# EAGLE board Servo100x80 (EAGLE 6.0)
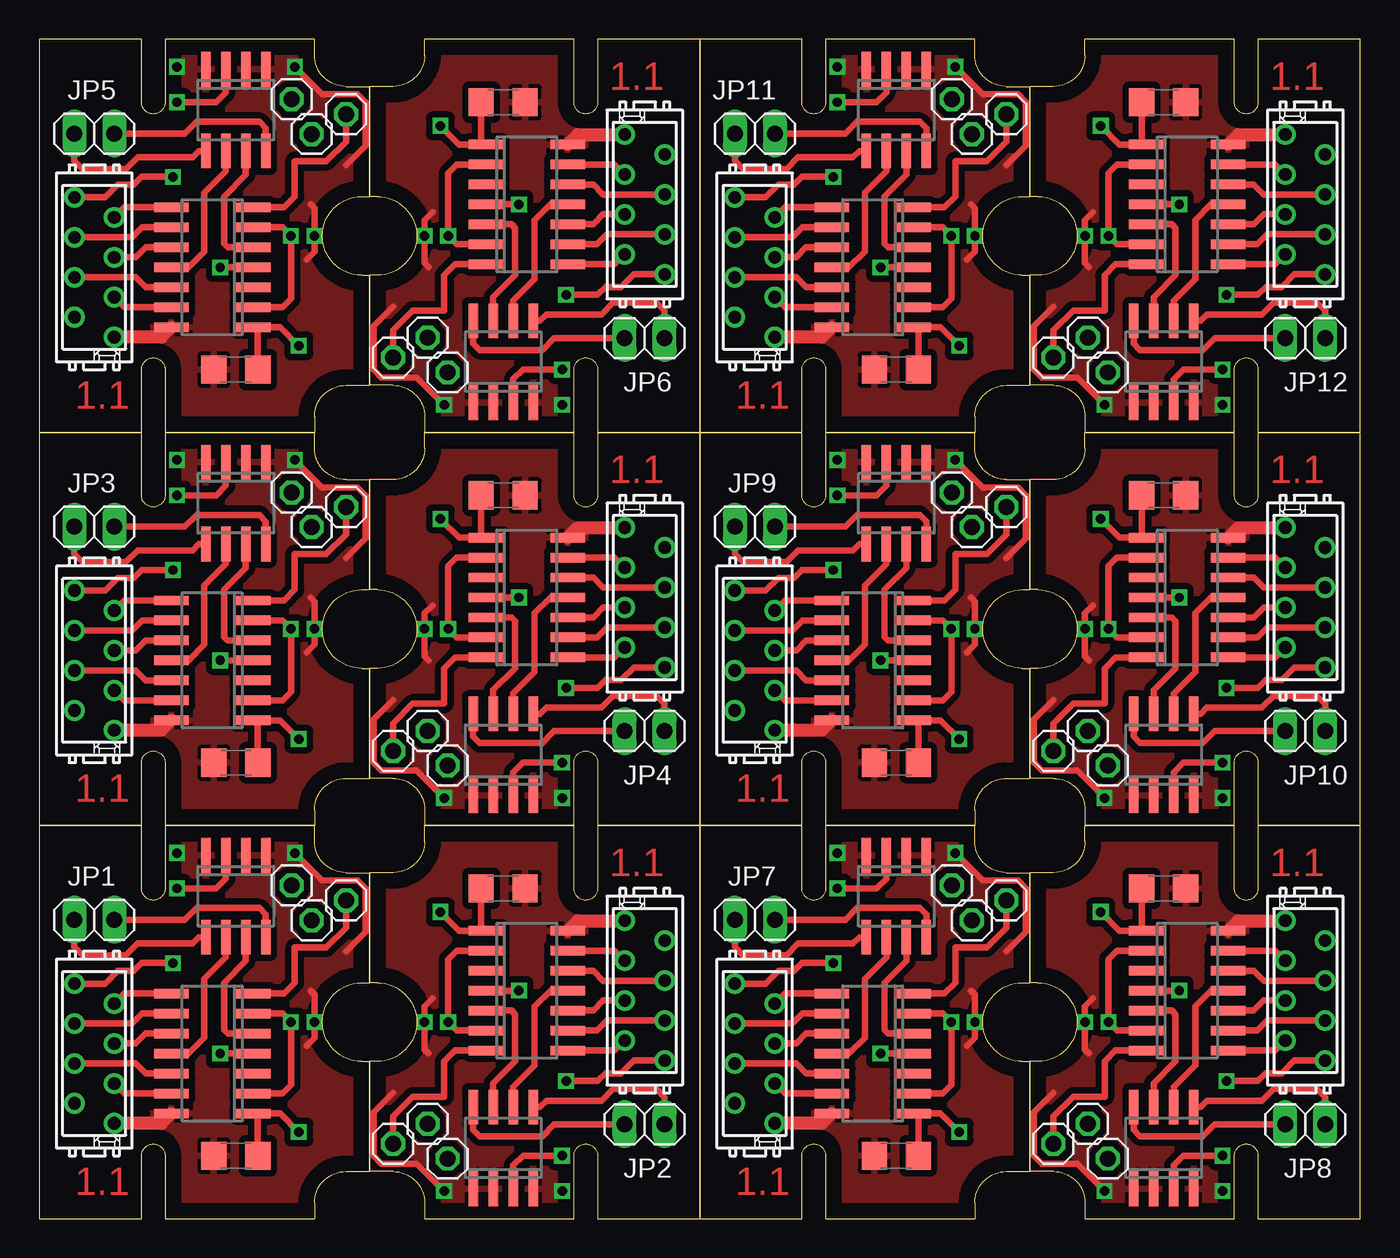
[diagram p0: board, top side]
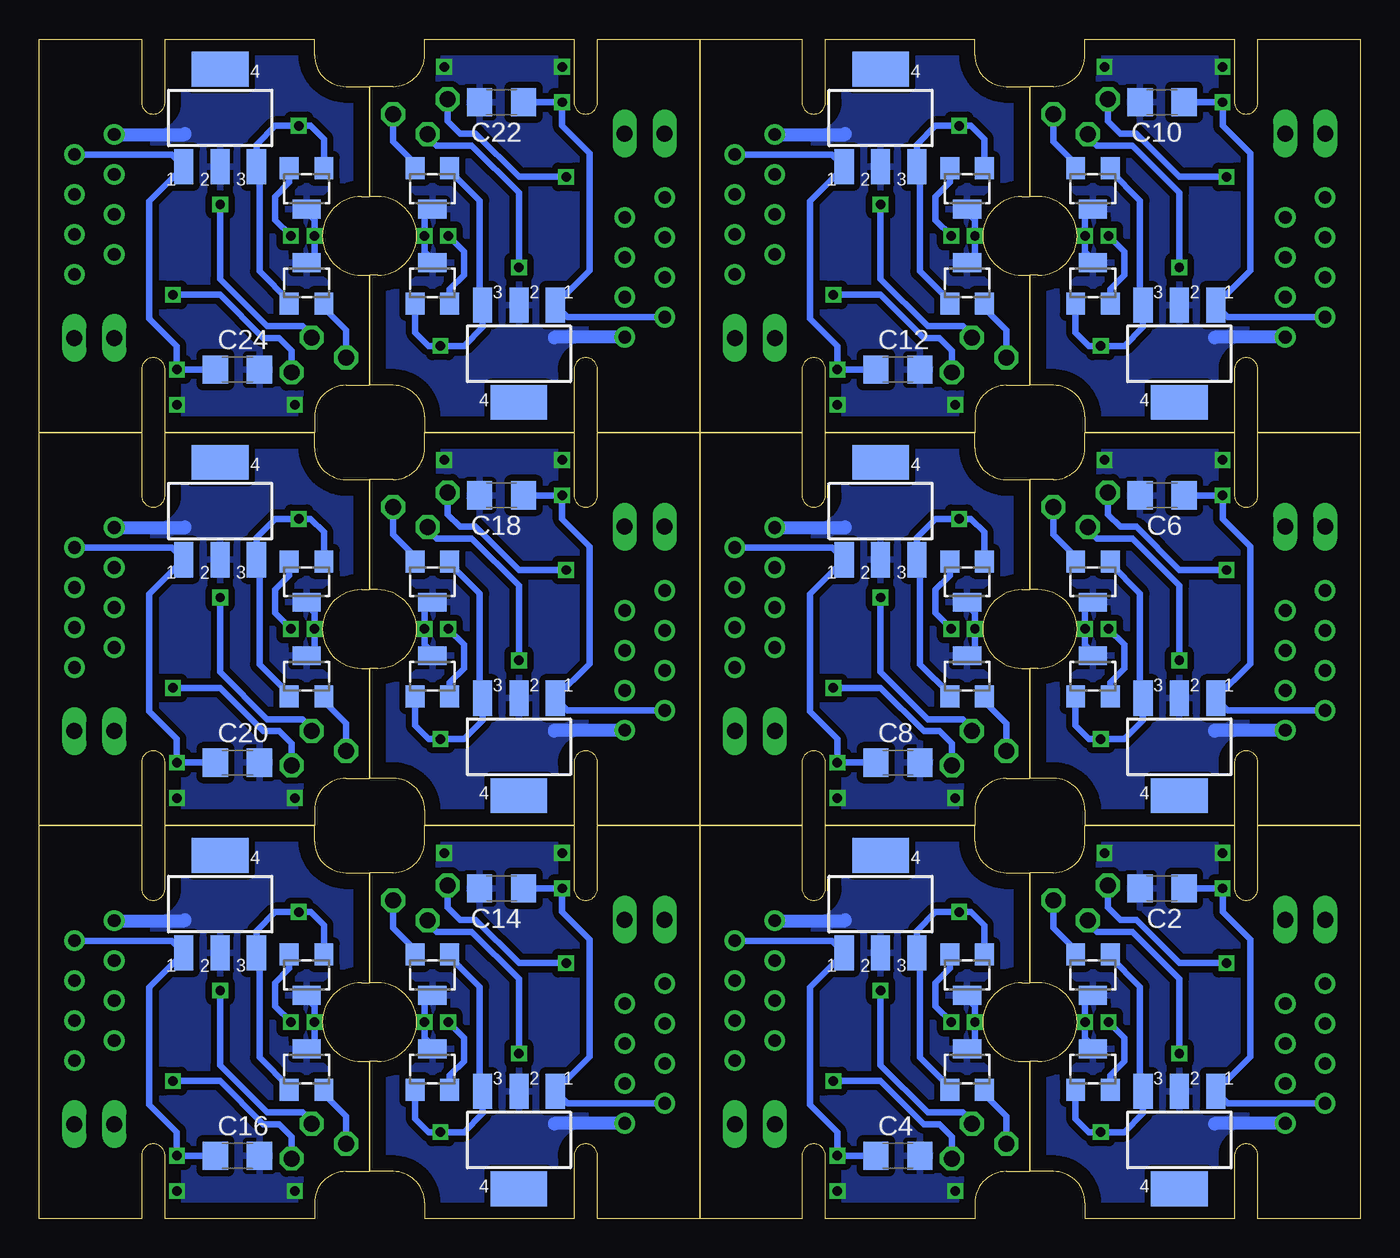
[diagram p1: board, bottom side, seen from below]

Size 84 x 75 mm. Coordinates in mm from the lower left corner, seen from the top.
Outline: 264 segments
Copper layers (1*16): Top 0.035mm / dielectric 1.5mm / Bottom 0.035mm
Design rules: minimum track width 10mil, minimum drill 24mil, track to track 8mil, track to pad 8mil, pad to pad 8mil, via to via 8mil, smd to smd 8mil, copper to edge 40mil, drill to drill 8mil, minimum pad ring 10mil, minimum via ring 8mil, stop-mask expansion 4mil, vias tented up to drill 0mil, thermal gap 10mil

## Footprints (pad centres in the part's own frame; a part is rotated, then mirrored left to right if it is on the bottom)
1X01 = drill 1.016 octagon: 1 0,0
C1206 = smd 1.6 x 1.8: 1 -1.4,0; 2 1.4,0
SOT23-W = smd 1.2 x 1.4: 1 -1.1,-1.3; 2 1.1,-1.3 | smd 1.8 x 1.2: 3 0,1.3
SOT223 = smd 1.219 x 2.235: 1 -2.311,-3.099; 2 0,-3.099; 3 2.311,-3.099 | smd 3.6 x 2.2: 4 0,3.099
1X02 = drill 1.016 long: 1 -1.27,0; 2 1.27,0
SO-14 = smd 0.6 x 2.2: 1 -3.81,-2.6; 2 -2.54,-2.6; 3 -1.27,-2.6; 4 0,-2.6; 5 1.27,-2.6; 6 2.54,-2.6; 7 3.81,-2.6; 8 3.81,2.6; 9 2.54,2.6; 10 1.27,2.6; 11 0,2.6; 12 -1.27,2.6; 13 -2.54,2.6; 14 -3.81,2.6
SO-08 = smd 0.6 x 2.2: 1 -1.905,-2.6; 2 -0.635,-2.6; 3 0.635,-2.6; 4 1.905,-2.6; 5 1.905,2.6; 6 0.635,2.6; 7 -0.635,2.6; 8 -1.905,2.6
MICROMATCH-8 = drill 0.813: 1 4.445,1.27; 2 3.175,-1.27; 3 1.905,1.27; 4 0.635,-1.27; 5 -0.635,1.27; 6 -1.905,-1.27; 7 -3.175,1.27; 8 -4.445,-1.27

## Placement (x,y rotation side)
!MCLR  [1X01]  17.31,18.98 0 top
!MCLR1  [1X01]  24.69,6.02 180 top
!MCLR2  [1X01]  17.31,43.98 0 top
!MCLR3  [1X01]  24.69,31.02 180 top
!MCLR4  [1X01]  17.31,68.98 0 top
!MCLR5  [1X01]  24.69,56.02 180 top
!MCLR6  [1X01]  59.31,18.98 0 top
!MCLR7  [1X01]  66.69,6.02 180 top
!MCLR8  [1X01]  59.31,43.98 0 top
!MCLR9  [1X01]  66.69,31.02 180 top
!MCLR10  [1X01]  59.31,68.98 0 top
!MCLR11  [1X01]  66.69,56.02 180 top
C1  [C1206]  12.5,4 180 top
C2  [C1206]  12.6,21 180 bottom
C3  [C1206]  29.5,21 0 top
C4  [C1206]  29.4,4 0 bottom
C5  [C1206]  12.5,29 180 top
C6  [C1206]  12.6,46 180 bottom
C7  [C1206]  29.5,46 0 top
C8  [C1206]  29.4,29 0 bottom
C9  [C1206]  12.5,54 180 top
C10  [C1206]  12.6,71 180 bottom
C11  [C1206]  29.5,71 0 top
C12  [C1206]  29.4,54 0 bottom
C13  [C1206]  54.5,4 180 top
C14  [C1206]  54.6,21 180 bottom
C15  [C1206]  71.5,21 0 top
C16  [C1206]  71.4,4 0 bottom
C17  [C1206]  54.5,29 180 top
C18  [C1206]  54.6,46 180 bottom
C19  [C1206]  71.5,46 0 top
C20  [C1206]  71.4,29 0 bottom
C21  [C1206]  54.5,54 180 top
C22  [C1206]  54.6,71 180 bottom
C23  [C1206]  71.5,71 0 top
C24  [C1206]  71.4,54 0 bottom
HALL1  [1X01]  19.51,20.25 0 top
HALL2  [1X01]  22.49,4.75 180 top
HALL3  [1X01]  19.51,45.25 0 top
HALL4  [1X01]  22.49,29.75 180 top
HALL5  [1X01]  19.51,70.25 0 top
HALL6  [1X01]  22.49,54.75 180 top
HALL7  [1X01]  61.51,20.25 0 top
HALL8  [1X01]  64.49,4.75 180 top
HALL9  [1X01]  61.51,45.25 0 top
HALL10  [1X01]  64.49,29.75 180 top
HALL11  [1X01]  61.51,70.25 0 top
HALL12  [1X01]  64.49,54.75 180 top
IC1  A1202LH  [SOT23-W]  25,9.5 0 bottom
IC2  A1202LH  [SOT23-W]  17,15.5 180 bottom
IC3  A1202LH  [SOT23-W]  17,9.5 0 bottom
IC4  MCP1703DB  [SOT223]  11.5,5 180 bottom
IC5  A1202LH  [SOT23-W]  25,15.5 180 bottom
IC6  MCP1703DB  [SOT223]  30.5,20 0 bottom
IC7  A1202LH  [SOT23-W]  17,40.5 180 bottom
IC8  A1202LH  [SOT23-W]  17,34.5 0 bottom
IC9  MCP1703DB  [SOT223]  11.5,30 180 bottom
IC10  A1202LH  [SOT23-W]  25,34.5 0 bottom
IC11  A1202LH  [SOT23-W]  25,40.5 180 bottom
IC12  MCP1703DB  [SOT223]  30.5,45 0 bottom
IC13  A1202LH  [SOT23-W]  17,65.5 180 bottom
IC14  A1202LH  [SOT23-W]  17,59.5 0 bottom
IC15  MCP1703DB  [SOT223]  11.5,55 180 bottom
IC16  A1202LH  [SOT23-W]  25,59.5 0 bottom
IC17  A1202LH  [SOT23-W]  25,65.5 180 bottom
IC18  MCP1703DB  [SOT223]  30.5,70 0 bottom
IC19  A1202LH  [SOT23-W]  59,15.5 180 bottom
IC20  A1202LH  [SOT23-W]  59,9.5 0 bottom
IC21  MCP1703DB  [SOT223]  53.5,5 180 bottom
IC22  A1202LH  [SOT23-W]  67,9.5 0 bottom
IC23  A1202LH  [SOT23-W]  67,15.5 180 bottom
IC24  MCP1703DB  [SOT223]  72.5,20 0 bottom
IC25  A1202LH  [SOT23-W]  59,40.5 180 bottom
IC26  A1202LH  [SOT23-W]  59,34.5 0 bottom
IC27  MCP1703DB  [SOT223]  53.5,30 180 bottom
IC28  A1202LH  [SOT23-W]  67,34.5 0 bottom
IC29  A1202LH  [SOT23-W]  67,40.5 180 bottom
IC30  MCP1703DB  [SOT223]  72.5,45 0 bottom
IC31  A1202LH  [SOT23-W]  59,65.5 180 bottom
IC32  A1202LH  [SOT23-W]  59,59.5 0 bottom
IC33  MCP1703DB  [SOT223]  53.5,55 180 bottom
IC34  A1202LH  [SOT23-W]  67,59.5 0 bottom
IC35  A1202LH  [SOT23-W]  67,65.5 180 bottom
IC36  MCP1703DB  [SOT223]  72.5,70 0 bottom
JP1  [1X02]  3.5,19 180 top
JP2  [1X02]  38.5,6 0 top
JP3  [1X02]  3.5,44 180 top
JP4  [1X02]  38.5,31 0 top
JP5  [1X02]  3.5,69 180 top
JP6  [1X02]  38.5,56 0 top
JP7  [1X02]  45.5,19 180 top
JP8  [1X02]  80.5,6 0 top
JP9  [1X02]  45.5,44 180 top
JP10  [1X02]  80.5,31 0 top
JP11  [1X02]  45.5,69 180 top
JP12  [1X02]  80.5,56 0 top
U$1  PIC16F1503SOIC  [SO-14]  11,10.5 90 top
U$2  SI9986SO8  [SO-08]  12.5,20.5 180 top
U$3  PIC16F1503SOIC  [SO-14]  31,14.5 270 top
U$4  SI9986SO8  [SO-08]  29.5,4.5 0 top
U$5  PIC16F1503SOIC  [SO-14]  11,35.5 90 top
U$6  SI9986SO8  [SO-08]  12.5,45.5 180 top
U$7  PIC16F1503SOIC  [SO-14]  31,39.5 270 top
U$8  SI9986SO8  [SO-08]  29.5,29.5 0 top
U$9  PIC16F1503SOIC  [SO-14]  11,60.5 90 top
U$10  SI9986SO8  [SO-08]  12.5,70.5 180 top
U$11  PIC16F1503SOIC  [SO-14]  31,64.5 270 top
U$12  SI9986SO8  [SO-08]  29.5,54.5 0 top
U$13  PIC16F1503SOIC  [SO-14]  53,10.5 90 top
U$14  SI9986SO8  [SO-08]  54.5,20.5 180 top
U$15  PIC16F1503SOIC  [SO-14]  73,14.5 270 top
U$16  SI9986SO8  [SO-08]  71.5,4.5 0 top
U$17  PIC16F1503SOIC  [SO-14]  53,35.5 90 top
U$18  SI9986SO8  [SO-08]  54.5,45.5 180 top
U$19  PIC16F1503SOIC  [SO-14]  73,39.5 270 top
U$20  SI9986SO8  [SO-08]  71.5,29.5 0 top
U$21  PIC16F1503SOIC  [SO-14]  53,60.5 90 top
U$22  SI9986SO8  [SO-08]  54.5,70.5 180 top
U$23  PIC16F1503SOIC  [SO-14]  73,64.5 270 top
U$24  SI9986SO8  [SO-08]  71.5,54.5 0 top
VPP  [1X01]  16.04,21.18 0 top
VPP1  [1X01]  25.96,3.82 180 top
VPP2  [1X01]  16.04,46.18 0 top
VPP3  [1X01]  25.96,28.82 180 top
VPP4  [1X01]  16.04,71.18 0 top
VPP5  [1X01]  25.96,53.82 180 top
VPP6  [1X01]  58.04,21.18 0 top
VPP7  [1X01]  67.96,3.82 180 top
VPP8  [1X01]  58.04,46.18 0 top
VPP9  [1X01]  67.96,28.82 180 top
VPP10  [1X01]  58.04,71.18 0 top
VPP11  [1X01]  67.96,53.82 180 top
X1  MICROMATCH-8  [MICROMATCH-8]  3.5,10.5 270 top
X2  MICROMATCH-8  [MICROMATCH-8]  38.5,14.5 90 top
X3  MICROMATCH-8  [MICROMATCH-8]  3.5,35.5 270 top
X4  MICROMATCH-8  [MICROMATCH-8]  38.5,39.5 90 top
X5  MICROMATCH-8  [MICROMATCH-8]  3.5,60.5 270 top
X6  MICROMATCH-8  [MICROMATCH-8]  38.5,64.5 90 top
X7  MICROMATCH-8  [MICROMATCH-8]  45.5,10.5 270 top
X8  MICROMATCH-8  [MICROMATCH-8]  80.5,14.5 90 top
X9  MICROMATCH-8  [MICROMATCH-8]  45.5,35.5 270 top
X10  MICROMATCH-8  [MICROMATCH-8]  80.5,39.5 90 top
X11  MICROMATCH-8  [MICROMATCH-8]  45.5,60.5 270 top
X12  MICROMATCH-8  [MICROMATCH-8]  80.5,64.5 90 top

## Library data of the parts
!MCLR !MCLR1-!MCLR11 HALL1-HALL12 JP1-JP12 VPP VPP1-VPP11 = pinhead
C1-C24 = rcl
IC1-IC3 IC5 IC7 IC8 IC10 IC11 IC13 IC14 IC16 IC17 IC19 IC20 IC22 IC23 IC25 IC26 IC28 IC29 IC31 IC32 IC34 IC35 = allegro; OC_FARNELL: unknown; OC_NEWARK: unknown
IC4 IC6 IC9 IC12 IC15 IC18 IC21 IC24 IC27 IC30 IC33 IC36 = linear
U$1 U$3 U$5 U$7 U$9 U$11 U$13 U$15 U$17 U$19 U$21 U$23 = PIC16F1503
U$2 U$4 U$6 U$8 U$10 U$12 U$14 U$16 U$18 U$20 U$22 U$24 = si9986
X1-X12 = con-amp-micromatch; MF: FARNELL; MPN: 7-215464-8; OC_FARNELL: 3784642; OC_NEWARK: 26H0301

## Nets
!MCLR: !MCLR.1 U$1.4
!MCLR1: !MCLR1.1 U$3.4
!MCLR2: !MCLR2.1 U$5.4
!MCLR3: !MCLR3.1 U$7.4
!MCLR4: !MCLR4.1 U$9.4
!MCLR5: !MCLR5.1 U$11.4
!MCLR6: !MCLR6.1 U$13.4
!MCLR7: !MCLR7.1 U$15.4
!MCLR8: !MCLR8.1 U$17.4
!MCLR9: !MCLR9.1 U$19.4
!MCLR10: !MCLR10.1 U$21.4
!MCLR11: !MCLR11.1 U$23.4
+5V: C1.1 IC2.1 IC3.1 IC4.3 U$1.1
+5V1: C3.1 IC1.1 IC5.1 IC6.3 U$3.1
+5V2: C5.1 IC7.1 IC8.1 IC9.3 U$5.1
+5V3: C7.1 IC10.1 IC11.1 IC12.3 U$7.1
+5V4: C9.1 IC13.1 IC14.1 IC15.3 U$9.1
+5V5: C11.1 IC16.1 IC17.1 IC18.3 U$11.1
+5V6: C13.1 IC19.1 IC20.1 IC21.3 U$13.1
+5V7: C15.1 IC22.1 IC23.1 IC24.3 U$15.1
+5V8: C17.1 IC25.1 IC26.1 IC27.3 U$17.1
+5V9: C19.1 IC28.1 IC29.1 IC30.3 U$19.1
+5V10: C21.1 IC31.1 IC32.1 IC33.3 U$21.1
+5V11: C23.1 IC34.1 IC35.1 IC36.3 U$23.1
GND: C1.2 C2.2 IC2.3 IC3.3 IC4.2 U$1.14 U$2.1 U$2.2 U$2.4 X1.1
GND1: C3.2 C4.2 IC1.3 IC5.3 IC6.2 U$3.14 U$4.1 U$4.2 U$4.4 X2.1
GND2: C5.2 C6.2 IC7.3 IC8.3 IC9.2 U$5.14 U$6.1 U$6.2 U$6.4 X3.1
GND3: C7.2 C8.2 IC10.3 IC11.3 IC12.2 U$7.14 U$8.1 U$8.2 U$8.4 X4.1
GND4: C9.2 C10.2 IC13.3 IC14.3 IC15.2 U$9.14 U$10.1 U$10.2 U$10.4 X5.1
GND5: C11.2 C12.2 IC16.3 IC17.3 IC18.2 U$11.14 U$12.1 U$12.2 U$12.4 X6.1
GND6: C13.2 C14.2 IC19.3 IC20.3 IC21.2 U$13.14 U$14.1 U$14.2 U$14.4 X7.1
GND7: C15.2 C16.2 IC22.3 IC23.3 IC24.2 U$15.14 U$16.1 U$16.2 U$16.4 X8.1
GND8: C17.2 C18.2 IC25.3 IC26.3 IC27.2 U$17.14 U$18.1 U$18.2 U$18.4 X9.1
GND9: C19.2 C20.2 IC28.3 IC29.3 IC30.2 U$19.14 U$20.1 U$20.2 U$20.4 X10.1
GND10: C21.2 C22.2 IC31.3 IC32.3 IC33.2 U$21.14 U$22.1 U$22.2 U$22.4 X11.1
GND11: C23.2 C24.2 IC34.3 IC35.3 IC36.2 U$23.14 U$24.1 U$24.2 U$24.4 X12.1
HALL1: HALL1.1 IC2.2 U$1.7
HALL2: IC3.2 U$1.2 U$1.6
HALL3: IC5.2 U$3.2 U$3.6
HALL4: HALL2.1 IC1.2 U$3.7
HALL5: IC8.2 U$5.2 U$5.6
HALL6: HALL3.1 IC7.2 U$5.7
HALL7: IC11.2 U$7.2 U$7.6
HALL8: HALL4.1 IC10.2 U$7.7
HALL9: IC14.2 U$9.2 U$9.6
HALL10: HALL5.1 IC13.2 U$9.7
HALL11: IC17.2 U$11.2 U$11.6
HALL12: HALL6.1 IC16.2 U$11.7
HALL13: IC20.2 U$13.2 U$13.6
HALL14: HALL7.1 IC19.2 U$13.7
HALL15: IC23.2 U$15.2 U$15.6
HALL16: HALL8.1 IC22.2 U$15.7
HALL17: IC26.2 U$17.2 U$17.6
HALL18: HALL9.1 IC25.2 U$17.7
HALL19: IC29.2 U$19.2 U$19.6
HALL20: HALL10.1 IC28.2 U$19.7
HALL21: IC32.2 U$21.2 U$21.6
HALL22: HALL11.1 IC31.2 U$21.7
HALL23: IC35.2 U$23.2 U$23.6
HALL24: HALL12.1 IC34.2 U$23.7
ICSPCLK: U$1.12 X1.4
ICSPCLK1: U$3.12 X2.4
ICSPCLK2: U$5.12 X3.4
ICSPCLK3: U$7.12 X4.4
ICSPCLK4: U$9.12 X5.4
ICSPCLK5: U$11.12 X6.4
ICSPCLK6: U$13.12 X7.4
ICSPCLK7: U$15.12 X8.4
ICSPCLK8: U$17.12 X9.4
ICSPCLK9: U$19.12 X10.4
ICSPCLK10: U$21.12 X11.4
ICSPCLK11: U$23.12 X12.4
ICSPDAT: U$1.13 X1.3
ICSPDAT1: U$3.13 X2.3
ICSPDAT2: U$5.13 X3.3
ICSPDAT3: U$7.13 X4.3
ICSPDAT4: U$9.13 X5.3
ICSPDAT5: U$11.13 X6.3
ICSPDAT6: U$13.13 X7.3
ICSPDAT7: U$15.13 X8.3
ICSPDAT8: U$17.13 X9.3
ICSPDAT9: U$19.13 X10.3
ICSPDAT10: U$21.13 X11.3
ICSPDAT11: U$23.13 X12.3
IO1: U$1.8 X1.7
IO2: U$3.8 X2.7
IO3: U$5.8 X3.7
IO4: U$7.8 X4.7
IO5: U$9.8 X5.7
IO6: U$11.8 X6.7
IO7: U$13.8 X7.7
IO8: U$15.8 X8.7
IO9: U$17.8 X9.7
IO10: U$19.8 X10.7
IO11: U$21.8 X11.7
IO12: U$23.8 X12.7
OUTA: JP1.1 U$2.8
OUTA1: JP2.1 U$4.8
OUTA2: JP3.1 U$6.8
OUTA3: JP4.1 U$8.8
OUTA4: JP5.1 U$10.8
OUTA5: JP6.1 U$12.8
OUTA6: JP7.1 U$14.8
OUTA7: JP8.1 U$16.8
OUTA8: JP9.1 U$18.8
OUTA9: JP10.1 U$20.8
OUTA10: JP11.1 U$22.8
OUTA11: JP12.1 U$24.8
OUTB: JP1.2 U$2.5
OUTB1: JP2.2 U$4.5
OUTB2: JP3.2 U$6.5
OUTB3: JP4.2 U$8.5
OUTB4: JP5.2 U$10.5
OUTB5: JP6.2 U$12.5
OUTB6: JP7.2 U$14.5
OUTB7: JP8.2 U$16.5
OUTB8: JP9.2 U$18.5
OUTB9: JP10.2 U$20.5
OUTB10: JP11.2 U$22.5
OUTB11: JP12.2 U$24.5
PWM1: U$1.5 U$2.7
PWM2: U$3.11 U$4.6
PWM3: U$1.11 U$2.6
PWM4: U$3.5 U$4.7
PWM5: U$5.11 U$6.6
PWM6: U$5.5 U$6.7
PWM7: U$7.11 U$8.6
PWM8: U$7.5 U$8.7
PWM9: U$9.11 U$10.6
PWM10: U$9.5 U$10.7
PWM11: U$11.11 U$12.6
PWM12: U$11.5 U$12.7
PWM13: U$13.11 U$14.6
PWM14: U$13.5 U$14.7
PWM15: U$15.11 U$16.6
PWM16: U$15.5 U$16.7
PWM17: U$17.11 U$18.6
PWM18: U$17.5 U$18.7
PWM19: U$19.11 U$20.6
PWM20: U$19.5 U$20.7
PWM21: U$21.11 U$22.6
PWM22: U$21.5 U$22.7
PWM23: U$23.11 U$24.6
PWM24: U$23.5 U$24.7
SCL: U$1.10 X1.5
SCL1: U$3.10 X2.5
SCL2: U$5.10 X3.5
SCL3: U$7.10 X4.5
SCL4: U$9.10 X5.5
SCL5: U$11.10 X6.5
SCL6: U$13.10 X7.5
SCL7: U$15.10 X8.5
SCL8: U$17.10 X9.5
SCL9: U$19.10 X10.5
SCL10: U$21.10 X11.5
SCL11: U$23.10 X12.5
SDA: U$1.9 X1.6
SDA1: U$3.9 X2.6
SDA2: U$5.9 X3.6
SDA3: U$7.9 X4.6
SDA4: U$9.9 X5.6
SDA5: U$11.9 X6.6
SDA6: U$13.9 X7.6
SDA7: U$15.9 X8.6
SDA8: U$17.9 X9.6
SDA9: U$19.9 X10.6
SDA10: U$21.9 X11.6
SDA11: U$23.9 X12.6
V+: C2.1 IC4.1 U$2.3 X1.2
V+1: C4.1 IC6.1 U$4.3 X2.2
V+2: C6.1 IC9.1 U$6.3 X3.2
V+3: C8.1 IC12.1 U$8.3 X4.2
V+4: C10.1 IC15.1 U$10.3 X5.2
V+5: C12.1 IC18.1 U$12.3 X6.2
V+6: C14.1 IC21.1 U$14.3 X7.2
V+7: C16.1 IC24.1 U$16.3 X8.2
V+8: C18.1 IC27.1 U$18.3 X9.2
V+9: C20.1 IC30.1 U$20.3 X10.2
V+10: C22.1 IC33.1 U$22.3 X11.2
V+11: C24.1 IC36.1 U$24.3 X12.2
VPP: VPP.1 X1.8
VPP1: VPP1.1 X2.8
VPP2: VPP2.1 X3.8
VPP3: VPP3.1 X4.8
VPP4: VPP4.1 X5.8
VPP5: VPP5.1 X6.8
VPP6: VPP6.1 X7.8
VPP7: VPP7.1 X8.8
VPP8: VPP8.1 X9.8
VPP9: VPP9.1 X10.8
VPP10: VPP10.1 X11.8
VPP11: VPP11.1 X12.8

## Tracks (layer width: path | path; a pad name or v marks a point on that pad's centre or on a via)
!MCLR  (via drill 0.6)
  Top 0.406: U$1.4 v11.5,10.5
  Bottom 0.406: v11.5,10.5 11.5,15.25 14.5,18.25 16.75,18.25 17.31,18.81 !MCLR.1
!MCLR1  (via drill 0.6)
  Top 0.406: U$3.4 v30.5,14.5
  Bottom 0.406: v30.5,14.5 30.5,9.75 27.5,6.75 25.25,6.75 24.69,6.19 !MCLR1.1
!MCLR2  (via drill 0.6)
  Top 0.406: U$5.4 v11.5,35.5
  Bottom 0.406: v11.5,35.5 11.5,40.25 14.5,43.25 16.75,43.25 17.31,43.81 !MCLR2.1
!MCLR3  (via drill 0.6)
  Top 0.406: U$7.4 v30.5,39.5
  Bottom 0.406: v30.5,39.5 30.5,34.75 27.5,31.75 25.25,31.75 24.69,31.19 !MCLR3.1
!MCLR4  (via drill 0.6)
  Top 0.406: U$9.4 v11.5,60.5
  Bottom 0.406: v11.5,60.5 11.5,65.25 14.5,68.25 16.75,68.25 17.31,68.81 !MCLR4.1
!MCLR5  (via drill 0.6)
  Top 0.406: U$11.4 v30.5,64.5
  Bottom 0.406: v30.5,64.5 30.5,59.75 27.5,56.75 25.25,56.75 24.69,56.19 !MCLR5.1
!MCLR6  (via drill 0.6)
  Top 0.406: U$13.4 v53.5,10.5
  Bottom 0.406: v53.5,10.5 53.5,15.25 56.5,18.25 58.75,18.25 59.31,18.81 !MCLR6.1
!MCLR7  (via drill 0.6)
  Top 0.406: U$15.4 v72.5,14.5
  Bottom 0.406: v72.5,14.5 72.5,9.75 69.5,6.75 67.25,6.75 66.69,6.19 !MCLR7.1
!MCLR8  (via drill 0.6)
  Top 0.406: U$17.4 v53.5,35.5
  Bottom 0.406: v53.5,35.5 53.5,40.25 56.5,43.25 58.75,43.25 59.31,43.81 !MCLR8.1
!MCLR9  (via drill 0.6)
  Top 0.406: U$19.4 v72.5,39.5
  Bottom 0.406: v72.5,39.5 72.5,34.75 69.5,31.75 67.25,31.75 66.69,31.19 !MCLR9.1
!MCLR10  (via drill 0.6)
  Top 0.406: U$21.4 v53.5,60.5
  Bottom 0.406: v53.5,60.5 53.5,65.25 56.5,68.25 58.75,68.25 59.31,68.81 !MCLR10.1
!MCLR11  (via drill 0.6)
  Top 0.406: U$23.4 v72.5,64.5
  Bottom 0.406: v72.5,64.5 72.5,59.75 69.5,56.75 67.25,56.75 66.69,56.19 !MCLR11.1
+5V  (via drill 0.6)
  Top 0.406: v16.5,5.5 15.31,6.69 U$1.1 13.9,6.39 13.9,4.1 14,4 C1.1
  Bottom 0.406: IC2.1 15.9,16.65 14,14.75 14,8.1 IC4.3 13.81,6.69 15,5.5 v16.5,5.5 17.25,5.5 18.1,6.35 IC3.1
+5V1  (via drill 0.6)
  Top 0.406: v25.5,19.5 26.69,18.31 U$3.1 28.1,18.61 28.1,20.9 28,21 C3.1
  Bottom 0.406: IC1.1 26.1,8.35 28,10.25 28,16.9 IC6.3 28.19,18.31 27,19.5 v25.5,19.5 24.75,19.5 23.9,18.65 IC5.1
+5V2  (via drill 0.6)
  Top 0.406: v16.5,30.5 15.31,31.69 U$5.1 13.9,31.39 13.9,29.1 14,29 C5.1
  Bottom 0.406: IC7.1 15.9,41.65 14,39.75 14,33.1 IC9.3 13.81,31.69 15,30.5 v16.5,30.5 17.25,30.5 18.1,31.35 IC8.1
+5V3  (via drill 0.6)
  Top 0.406: v25.5,44.5 26.69,43.31 U$7.1 28.1,43.61 28.1,45.9 28,46 C7.1
  Bottom 0.406: IC10.1 26.1,33.35 28,35.25 28,41.9 IC12.3 28.19,43.31 27,44.5 v25.5,44.5 24.75,44.5 23.9,43.65 IC11.1
+5V4  (via drill 0.6)
  Top 0.406: v16.5,55.5 15.31,56.69 U$9.1 13.9,56.39 13.9,54.1 14,54 C9.1
  Bottom 0.406: IC13.1 15.9,66.65 14,64.75 14,58.1 IC15.3 13.81,56.69 15,55.5 v16.5,55.5 17.25,55.5 18.1,56.35 IC14.1
+5V5  (via drill 0.6)
  Top 0.406: v25.5,69.5 26.69,68.31 U$11.1 28.1,68.61 28.1,70.9 28,71 C11.1
  Bottom 0.406: IC16.1 26.1,58.35 28,60.25 28,66.9 IC18.3 28.19,68.31 27,69.5 v25.5,69.5 24.75,69.5 23.9,68.65 IC17.1
+5V6  (via drill 0.6)
  Top 0.406: v58.5,5.5 57.31,6.69 U$13.1 55.9,6.39 55.9,4.1 56,4 C13.1
  Bottom 0.406: IC19.1 57.9,16.65 56,14.75 56,8.1 IC21.3 55.81,6.69 57,5.5 v58.5,5.5 59.25,5.5 60.1,6.35 IC20.1
+5V7  (via drill 0.6)
  Top 0.406: v67.5,19.5 68.69,18.31 U$15.1 70.1,18.61 70.1,20.9 70,21 C15.1
  Bottom 0.406: IC22.1 68.1,8.35 70,10.25 70,16.9 IC24.3 70.19,18.31 69,19.5 v67.5,19.5 66.75,19.5 65.9,18.65 IC23.1
+5V8  (via drill 0.6)
  Top 0.406: v58.5,30.5 57.31,31.69 U$17.1 55.9,31.39 55.9,29.1 56,29 C17.1
  Bottom 0.406: IC25.1 57.9,41.65 56,39.75 56,33.1 IC27.3 55.81,31.69 57,30.5 v58.5,30.5 59.25,30.5 60.1,31.35 IC26.1
+5V9  (via drill 0.6)
  Top 0.406: v67.5,44.5 68.69,43.31 U$19.1 70.1,43.61 70.1,45.9 70,46 C19.1
  Bottom 0.406: IC28.1 68.1,33.35 70,35.25 70,41.9 IC30.3 70.19,43.31 69,44.5 v67.5,44.5 66.75,44.5 65.9,43.65 IC29.1
+5V10  (via drill 0.6)
  Top 0.406: v58.5,55.5 57.31,56.69 U$21.1 55.9,56.39 55.9,54.1 56,54 C21.1
  Bottom 0.406: IC31.1 57.9,66.65 56,64.75 56,58.1 IC33.3 55.81,56.69 57,55.5 v58.5,55.5 59.25,55.5 60.1,56.35 IC32.1
+5V11  (via drill 0.6)
  Top 0.406: v67.5,69.5 68.69,68.31 U$23.1 70.1,68.61 70.1,70.9 70,71 C23.1
  Bottom 0.406: IC34.1 68.1,58.35 70,60.25 70,66.9 IC36.3 70.19,68.31 69,69.5 v67.5,69.5 66.75,69.5 65.9,68.65 IC35.1
GND  (via drill 0.6)
  Top 0.406: 17.25,14.5 17.5,14.25 v17.5,12.5 17.5,11.5 17,11 | 19.5,17 20.75,18.25 20.75,21 20.25,21.5 18,21.5 v16.25,23.25
  Top 0.813: U$1.14 7.76,6.05 X1.1
  Bottom 0.406: IC3.3 17,11 17.5,11.5 v17.5,12.5 17.5,13.7 IC2.3
  Bottom 0.813: X1.1 9.25,6.05 9.25,6
  other vias: 8.75,23.25
  pour Bottom (isolate 0.406): 7.25,25 21,25 21,0 7.25,0
  pour Top (isolate 0.406): 7.25,25 21,25 21,0 7.25,0
GND1  (via drill 0.6)
  Top 0.406: 24.75,10.5 24.5,10.75 v24.5,12.5 24.5,13.5 25,14 | 22.5,8 21.25,6.75 21.25,4 21.75,3.5 24,3.5 v25.75,1.75
  Top 0.813: U$3.14 34.23,18.95 X2.1
  Bottom 0.406: IC5.3 25,14 24.5,13.5 v24.5,12.5 24.5,11.3 IC1.3
  Bottom 0.813: X2.1 32.75,18.95 32.75,19
  other vias: 33.25,1.75
  pour Bottom (isolate 0.406): 34.75,0 21,0 21,25 34.75,25
  pour Top (isolate 0.406): 34.75,0 21,0 21,25 34.75,25
GND2  (via drill 0.6)
  Top 0.406: 17.25,39.5 17.5,39.25 v17.5,37.5 17.5,36.5 17,36 | 19.5,42 20.75,43.25 20.75,46 20.25,46.5 18,46.5 v16.25,48.25
  Top 0.813: U$5.14 7.76,31.05 X3.1
  Bottom 0.406: IC8.3 17,36 17.5,36.5 v17.5,37.5 17.5,38.7 IC7.3
  Bottom 0.813: X3.1 9.25,31.05 9.25,31
  other vias: 8.75,48.25
  pour Bottom (isolate 0.406): 7.25,50 21,50 21,25 7.25,25
  pour Top (isolate 0.406): 7.25,50 21,50 21,25 7.25,25
GND3  (via drill 0.6)
  Top 0.406: 24.75,35.5 24.5,35.75 v24.5,37.5 24.5,38.5 25,39 | 22.5,33 21.25,31.75 21.25,29 21.75,28.5 24,28.5 v25.75,26.75
  Top 0.813: U$7.14 34.23,43.95 X4.1
  Bottom 0.406: IC11.3 25,39 24.5,38.5 v24.5,37.5 24.5,36.3 IC10.3
  Bottom 0.813: X4.1 32.75,43.95 32.75,44
  other vias: 33.25,26.75
  pour Bottom (isolate 0.406): 34.75,25 21,25 21,50 34.75,50
  pour Top (isolate 0.406): 34.75,25 21,25 21,50 34.75,50
GND4  (via drill 0.6)
  Top 0.406: 17.25,64.5 17.5,64.25 v17.5,62.5 17.5,61.5 17,61 | 19.5,67 20.75,68.25 20.75,71 20.25,71.5 18,71.5 v16.25,73.25
  Top 0.813: U$9.14 7.76,56.05 X5.1
  Bottom 0.406: IC14.3 17,61 17.5,61.5 v17.5,62.5 17.5,63.7 IC13.3
  Bottom 0.813: X5.1 9.25,56.05 9.25,56
  other vias: 8.75,73.25
  pour Bottom (isolate 0.406): 7.25,75 21,75 21,50 7.25,50
  pour Top (isolate 0.406): 7.25,75 21,75 21,50 7.25,50
GND5  (via drill 0.6)
  Top 0.406: 24.75,60.5 24.5,60.75 v24.5,62.5 24.5,63.5 25,64 | 22.5,58 21.25,56.75 21.25,54 21.75,53.5 24,53.5 v25.75,51.75
  Top 0.813: U$11.14 34.23,68.94 X6.1
  Bottom 0.406: IC17.3 25,64 24.5,63.5 v24.5,62.5 24.5,61.3 IC16.3
  Bottom 0.813: X6.1 32.75,68.94 32.75,69
  other vias: 33.25,51.75
  pour Bottom (isolate 0.406): 34.75,50 21,50 21,75 34.75,75
  pour Top (isolate 0.406): 34.75,50 21,50 21,75 34.75,75
GND6  (via drill 0.6)
  Top 0.406: 59.25,14.5 59.5,14.25 v59.5,12.5 59.5,11.5 59,11 | 61.5,17 62.75,18.25 62.75,21 62.25,21.5 60,21.5 v58.25,23.25
  Top 0.813: U$13.14 49.77,6.05 X7.1
  Bottom 0.406: IC20.3 59,11 59.5,11.5 v59.5,12.5 59.5,13.7 IC19.3
  Bottom 0.813: X7.1 51.25,6.05 51.25,6
  other vias: 50.75,23.25
  pour Bottom (isolate 0.406): 49.25,25 63,25 63,0 49.25,0
  pour Top (isolate 0.406): 49.25,25 63,25 63,0 49.25,0
GND7  (via drill 0.6)
  Top 0.406: 66.75,10.5 66.5,10.75 v66.5,12.5 66.5,13.5 67,14 | 64.5,8 63.25,6.75 63.25,4 63.75,3.5 66,3.5 v67.75,1.75
  Top 0.813: U$15.14 76.23,18.95 X8.1
  Bottom 0.406: IC23.3 67,14 66.5,13.5 v66.5,12.5 66.5,11.3 IC22.3
  Bottom 0.813: X8.1 74.75,18.95 74.75,19
  other vias: 75.25,1.75
  pour Bottom (isolate 0.406): 76.75,0 63,0 63,25 76.75,25
  pour Top (isolate 0.406): 76.75,0 63,0 63,25 76.75,25
GND8  (via drill 0.6)
  Top 0.406: 59.25,39.5 59.5,39.25 v59.5,37.5 59.5,36.5 59,36 | 61.5,42 62.75,43.25 62.75,46 62.25,46.5 60,46.5 v58.25,48.25
  Top 0.813: U$17.14 49.77,31.05 X9.1
  Bottom 0.406: IC26.3 59,36 59.5,36.5 v59.5,37.5 59.5,38.7 IC25.3
  Bottom 0.813: X9.1 51.25,31.05 51.25,31
  other vias: 50.75,48.25
  pour Bottom (isolate 0.406): 49.25,50 63,50 63,25 49.25,25
  pour Top (isolate 0.406): 49.25,50 63,50 63,25 49.25,25
GND9  (via drill 0.6)
  Top 0.406: 66.75,35.5 66.5,35.75 v66.5,37.5 66.5,38.5 67,39 | 64.5,33 63.25,31.75 63.25,29 63.75,28.5 66,28.5 v67.75,26.75
  Top 0.813: U$19.14 76.23,43.95 X10.1
  Bottom 0.406: IC29.3 67,39 66.5,38.5 v66.5,37.5 66.5,36.3 IC28.3
  Bottom 0.813: X10.1 74.75,43.95 74.75,44
  other vias: 75.25,26.75
  pour Bottom (isolate 0.406): 76.75,25 63,25 63,50 76.75,50
  pour Top (isolate 0.406): 76.75,25 63,25 63,50 76.75,50
GND10  (via drill 0.6)
  Top 0.406: 59.25,64.5 59.5,64.25 v59.5,62.5 59.5,61.5 59,61 | 61.5,67 62.75,68.25 62.75,71 62.25,71.5 60,71.5 v58.25,73.25
  Top 0.813: U$21.14 49.77,56.05 X11.1
  Bottom 0.406: IC32.3 59,61 59.5,61.5 v59.5,62.5 59.5,63.7 IC31.3
  Bottom 0.813: X11.1 51.25,56.05 51.25,56
  other vias: 50.75,73.25
  pour Bottom (isolate 0.406): 49.25,75 63,75 63,50 49.25,50
  pour Top (isolate 0.406): 49.25,75 63,75 63,50 49.25,50
GND11  (via drill 0.6)
  Top 0.406: 66.75,60.5 66.5,60.75 v66.5,62.5 66.5,63.5 67,64 | 64.5,58 63.25,56.75 63.25,54 63.75,53.5 66,53.5 v67.75,51.75
  Top 0.813: U$23.14 76.23,68.94 X12.1
  Bottom 0.406: IC35.3 67,64 66.5,63.5 v66.5,62.5 66.5,61.3 IC34.3
  Bottom 0.813: X12.1 74.75,68.94 74.75,69
  other vias: 75.25,51.75
  pour Bottom (isolate 0.406): 76.75,50 63,50 63,75 76.75,75
  pour Top (isolate 0.406): 76.75,50 63,50 63,75 76.75,75
HALL1
  Top 0.406: U$1.7 15.56,14.31 16.25,15 16.25,17.25 18.25,17.25 19.5,18.5 HALL1.1
  Bottom 0.406: IC2.2 18.1,17.1 19.5,18.5 HALL1.1
HALL2  (via drill 0.6)
  Top 0.406: U$1.2 15.46,7.96 16,8.5 v16,12.5 15.46,13.04 U$1.6
  Bottom 0.406: IC3.2 15.9,9.1 15,10 15,11.5 v16,12.5
HALL3  (via drill 0.6)
  Top 0.406: U$3.2 26.54,17.04 26,16.5 v26,12.5 26.54,11.96 U$3.6
  Bottom 0.406: IC5.2 26.1,15.9 27,15 27,13.5 v26,12.5
HALL4
  Top 0.406: U$3.7 26.44,10.69 25.75,10 25.75,7.75 23.75,7.75 22.5,6.5 HALL2.1
  Bottom 0.406: IC1.2 23.9,7.9 22.5,6.5 HALL2.1
HALL5  (via drill 0.6)
  Top 0.406: U$5.2 15.46,32.96 16,33.5 v16,37.5 15.46,38.04 U$5.6
  Bottom 0.406: IC8.2 15.9,34.1 15,35 15,36.5 v16,37.5
HALL6
  Top 0.406: U$5.7 15.56,39.31 16.25,40 16.25,42.25 18.25,42.25 19.5,43.5 HALL3.1
  Bottom 0.406: IC7.2 18.1,42.1 19.5,43.5 HALL3.1
HALL7  (via drill 0.6)
  Top 0.406: U$7.2 26.54,42.04 26,41.5 v26,37.5 26.54,36.96 U$7.6
  Bottom 0.406: IC11.2 26.1,40.9 27,40 27,38.5 v26,37.5
HALL8
  Top 0.406: U$7.7 26.44,35.69 25.75,35 25.75,32.75 23.75,32.75 22.5,31.5 HALL4.1
  Bottom 0.406: IC10.2 23.9,32.9 22.5,31.5 HALL4.1
HALL9  (via drill 0.6)
  Top 0.406: U$9.2 15.46,57.96 16,58.5 v16,62.5 15.46,63.04 U$9.6
  Bottom 0.406: IC14.2 15.9,59.1 15,60 15,61.5 v16,62.5
HALL10
  Top 0.406: U$9.7 15.56,64.31 16.25,65 16.25,67.25 18.25,67.25 19.5,68.5 HALL5.1
  Bottom 0.406: IC13.2 18.1,67.1 19.5,68.5 HALL5.1
HALL11  (via drill 0.6)
  Top 0.406: U$11.2 26.54,67.04 26,66.5 v26,62.5 26.54,61.96 U$11.6
  Bottom 0.406: IC17.2 26.1,65.9 27,65 27,63.5 v26,62.5
HALL12
  Top 0.406: U$11.7 26.44,60.69 25.75,60 25.75,57.75 23.75,57.75 22.5,56.5 HALL6.1
  Bottom 0.406: IC16.2 23.9,57.9 22.5,56.5 HALL6.1
HALL13  (via drill 0.6)
  Top 0.406: U$13.2 57.46,7.96 58,8.5 v58,12.5 57.46,13.04 U$13.6
  Bottom 0.406: IC20.2 57.9,9.1 57,10 57,11.5 v58,12.5
HALL14
  Top 0.406: U$13.7 57.56,14.31 58.25,15 58.25,17.25 60.25,17.25 61.5,18.5 HALL7.1
  Bottom 0.406: IC19.2 60.1,17.1 61.5,18.5 HALL7.1
HALL15  (via drill 0.6)
  Top 0.406: U$15.2 68.54,17.04 68,16.5 v68,12.5 68.54,11.96 U$15.6
  Bottom 0.406: IC23.2 68.1,15.9 69,15 69,13.5 v68,12.5
HALL16
  Top 0.406: U$15.7 68.44,10.69 67.75,10 67.75,7.75 65.75,7.75 64.5,6.5 HALL8.1
  Bottom 0.406: IC22.2 65.9,7.9 64.5,6.5 HALL8.1
HALL17  (via drill 0.6)
  Top 0.406: U$17.2 57.46,32.96 58,33.5 v58,37.5 57.46,38.04 U$17.6
  Bottom 0.406: IC26.2 57.9,34.1 57,35 57,36.5 v58,37.5
HALL18
  Top 0.406: U$17.7 57.56,39.31 58.25,40 58.25,42.25 60.25,42.25 61.5,43.5 HALL9.1
  Bottom 0.406: IC25.2 60.1,42.1 61.5,43.5 HALL9.1
HALL19  (via drill 0.6)
  Top 0.406: U$19.2 68.54,42.04 68,41.5 v68,37.5 68.54,36.96 U$19.6
  Bottom 0.406: IC29.2 68.1,40.9 69,40 69,38.5 v68,37.5
HALL20
  Top 0.406: U$19.7 68.44,35.69 67.75,35 67.75,32.75 65.75,32.75 64.5,31.5 HALL10.1
  Bottom 0.406: IC28.2 65.9,32.9 64.5,31.5 HALL10.1
HALL21  (via drill 0.6)
  Top 0.406: U$21.2 57.46,57.96 58,58.5 v58,62.5 57.46,63.04 U$21.6
  Bottom 0.406: IC32.2 57.9,59.1 57,60 57,61.5 v58,62.5
HALL22
  Top 0.406: U$21.7 57.56,64.31 58.25,65 58.25,67.25 60.25,67.25 61.5,68.5 HALL11.1
  Bottom 0.406: IC31.2 60.1,67.1 61.5,68.5 HALL11.1
HALL23  (via drill 0.6)
  Top 0.406: U$23.2 68.54,67.04 68,66.5 v68,62.5 68.54,61.96 U$23.6
  Bottom 0.406: IC35.2 68.1,65.9 69,65 69,63.5 v68,62.5
HALL24
  Top 0.406: U$23.7 68.44,60.69 67.75,60 67.75,57.75 65.75,57.75 64.5,56.5 HALL12.1
  Bottom 0.406: IC34.2 65.9,57.9 64.5,56.5 HALL12.1
ICSPCLK
  Top 0.406: X1.4 6.13,9.87 6.77,9.23 U$1.12
ICSPCLK1
  Top 0.406: X2.4 35.87,15.13 35.23,15.77 U$3.12
ICSPCLK2
  Top 0.406: X3.4 6.13,34.87 6.77,34.23 U$5.12
ICSPCLK3
  Top 0.406: X4.4 35.87,40.13 35.23,40.77 U$7.12
ICSPCLK4
  Top 0.406: X5.4 6.13,59.87 6.77,59.23 U$9.12
ICSPCLK5
  Top 0.406: X6.4 35.87,65.14 35.23,65.77 U$11.12
ICSPCLK6
  Top 0.406: X7.4 48.13,9.87 48.77,9.23 U$13.12
ICSPCLK7
  Top 0.406: X8.4 77.86,15.13 77.23,15.77 U$15.12
ICSPCLK8
  Top 0.406: X9.4 48.13,34.87 48.77,34.23 U$17.12
ICSPCLK9
  Top 0.406: X10.4 77.86,40.13 77.23,40.77 U$19.12
ICSPCLK10
  Top 0.406: X11.4 48.13,59.87 48.77,59.23 U$21.12
ICSPCLK11
  Top 0.406: X12.4 77.86,65.14 77.23,65.77 U$23.12
ICSPDAT
  Top 0.406: U$1.13 5.41,7.96 X1.3
ICSPDAT1
  Top 0.406: U$3.13 36.59,17.04 X2.3
ICSPDAT2
  Top 0.406: U$5.13 5.41,32.96 X3.3
ICSPDAT3
  Top 0.406: U$7.13 36.59,42.04 X4.3
ICSPDAT4
  Top 0.406: U$9.13 5.41,57.96 X5.3
ICSPDAT5
  Top 0.406: U$11.13 36.59,67.04 X6.3
ICSPDAT6
  Top 0.406: U$13.13 47.41,7.96 X7.3
ICSPDAT7
  Top 0.406: U$15.13 78.59,17.04 X8.3
ICSPDAT8
  Top 0.406: U$17.13 47.41,32.96 X9.3
ICSPDAT9
  Top 0.406: U$19.13 78.59,42.04 X10.3
ICSPDAT10
  Top 0.406: U$21.13 47.41,57.96 X11.3
ICSPDAT11
  Top 0.406: U$23.13 78.59,67.04 X12.3
IO1
  Top 0.406: U$1.8 5.41,14.31 X1.7
IO2
  Top 0.406: U$3.8 36.59,10.69 X2.7
IO3
  Top 0.406: U$5.8 5.41,39.31 X3.7
IO4
  Top 0.406: U$7.8 36.59,35.69 X4.7
IO5
  Top 0.406: U$9.8 5.41,64.31 X5.7
IO6
  Top 0.406: U$11.8 36.59,60.69 X6.7
IO7
  Top 0.406: U$13.8 47.41,14.31 X7.7
IO8
  Top 0.406: U$15.8 78.59,10.69 X8.7
IO9
  Top 0.406: U$17.8 47.41,39.31 X9.7
IO10
  Top 0.406: U$19.8 78.59,35.69 X10.7
IO11
  Top 0.406: U$21.8 47.41,64.31 X11.7
IO12
  Top 0.406: U$23.8 78.59,60.69 X12.7
OUTA
  Top 0.406: U$2.8 14.4,19.34 14,19.75 10,19.75 9.25,19 JP1.1 4.75,19
OUTA1
  Top 0.406: U$4.8 27.59,5.66 28,5.25 32,5.25 32.75,6 JP2.1 37.25,6
OUTA2
  Top 0.406: U$6.8 14.4,44.34 14,44.75 10,44.75 9.25,44 JP3.1 4.75,44
OUTA3
  Top 0.406: U$8.8 27.59,30.66 28,30.25 32,30.25 32.75,31 JP4.1 37.25,31
OUTA4
  Top 0.406: U$10.8 14.4,69.34 14,69.75 10,69.75 9.25,69 JP5.1 4.75,69
OUTA5
  Top 0.406: U$12.8 27.59,55.66 28,55.25 32,55.25 32.75,56 JP6.1 37.25,56
OUTA6
  Top 0.406: U$14.8 56.41,19.34 56,19.75 52,19.75 51.25,19 JP7.1 46.75,19
OUTA7
  Top 0.406: U$16.8 69.59,5.66 70,5.25 74,5.25 74.75,6 JP8.1 79.25,6
OUTA8
  Top 0.406: U$18.8 56.41,44.34 56,44.75 52,44.75 51.25,44 JP9.1 46.75,44
OUTA9
  Top 0.406: U$20.8 69.59,30.66 70,30.25 74,30.25 74.75,31 JP10.1 79.25,31
OUTA10
  Top 0.406: U$22.8 56.41,69.34 56,69.75 52,69.75 51.25,69 JP11.1 46.75,69
OUTA11
  Top 0.406: U$24.8 69.59,55.66 70,55.25 74,55.25 74.75,56 JP12.1 79.25,56
OUTB
  Top 0.406: JP1.2 2.23,17.27 2.75,16.75 5.5,16.75 6.25,17.5 9.75,17.5 10.15,17.9 U$2.5
OUTB1
  Top 0.406: JP2.2 39.77,7.73 39.25,8.25 36.5,8.25 35.75,7.5 32.25,7.5 31.85,7.1 U$4.5
OUTB2
  Top 0.406: JP3.2 2.23,42.27 2.75,41.75 5.5,41.75 6.25,42.5 9.75,42.5 10.15,42.9 U$6.5
OUTB3
  Top 0.406: JP4.2 39.77,32.73 39.25,33.25 36.5,33.25 35.75,32.5 32.25,32.5 31.85,32.1 U$8.5
OUTB4
  Top 0.406: JP5.2 2.23,67.27 2.75,66.75 5.5,66.75 6.25,67.5 9.75,67.5 10.15,67.9 U$10.5
OUTB5
  Top 0.406: JP6.2 39.77,57.73 39.25,58.25 36.5,58.25 35.75,57.5 32.25,57.5 31.85,57.1 U$12.5
OUTB6
  Top 0.406: JP7.2 44.23,17.27 44.75,16.75 47.5,16.75 48.25,17.5 51.75,17.5 52.15,17.9 U$14.5
OUTB7
  Top 0.406: JP8.2 81.77,7.73 81.25,8.25 78.5,8.25 77.75,7.5 74.25,7.5 73.85,7.1 U$16.5
OUTB8
  Top 0.406: JP9.2 44.23,42.27 44.75,41.75 47.5,41.75 48.25,42.5 51.75,42.5 52.15,42.9 U$18.5
OUTB9
  Top 0.406: JP10.2 81.77,32.73 81.25,33.25 78.5,33.25 77.75,32.5 74.25,32.5 73.85,32.1 U$20.5
OUTB10
  Top 0.406: JP11.2 44.23,67.27 44.75,66.75 47.5,66.75 48.25,67.5 51.75,67.5 52.15,67.9 U$22.5
OUTB11
  Top 0.406: JP12.2 81.77,57.73 81.25,58.25 78.5,58.25 77.75,57.5 74.25,57.5 73.85,57.1 U$24.5
PWM1
  Top 0.406: U$1.5 11.98,11.77 11.75,12 11.75,15 13.13,16.39 U$2.7
PWM2
  Top 0.406: U$3.11 32.5,14.5 31.5,13.5 31.5,9.75 30.14,8.38 U$4.6
PWM3
  Top 0.406: U$1.11 9.5,10.5 10.5,11.5 10.5,15.25 11.87,16.61 U$2.6
PWM4
  Top 0.406: U$3.5 30.02,13.23 30.25,13 30.25,10 28.86,8.62 U$4.7
PWM5
  Top 0.406: U$5.11 9.5,35.5 10.5,36.5 10.5,40.25 11.87,41.62 U$6.6
PWM6
  Top 0.406: U$5.5 11.98,36.77 11.75,37 11.75,40 13.13,41.38 U$6.7
PWM7
  Top 0.406: U$7.11 32.5,39.5 31.5,38.5 31.5,34.75 30.14,33.38 U$8.6
PWM8
  Top 0.406: U$7.5 30.02,38.23 30.25,38 30.25,35 28.86,33.62 U$8.7
PWM9
  Top 0.406: U$9.11 9.5,60.5 10.5,61.5 10.5,65.25 11.87,66.61 U$10.6
PWM10
  Top 0.406: U$9.5 11.98,61.77 11.75,62 11.75,65 13.13,66.39 U$10.7
PWM11
  Top 0.406: U$11.11 32.5,64.5 31.5,63.5 31.5,59.75 30.14,58.38 U$12.6
PWM12
  Top 0.406: U$11.5 30.02,63.23 30.25,63 30.25,60 28.86,58.62 U$12.7
PWM13
  Top 0.406: U$13.11 51.5,10.5 52.5,11.5 52.5,15.25 53.87,16.61 U$14.6
PWM14
  Top 0.406: U$13.5 53.98,11.77 53.75,12 53.75,15 55.13,16.39 U$14.7
PWM15
  Top 0.406: U$15.11 74.5,14.5 73.5,13.5 73.5,9.75 72.14,8.38 U$16.6
PWM16
  Top 0.406: U$15.5 72.02,13.23 72.25,13 72.25,10 70.86,8.62 U$16.7
PWM17
  Top 0.406: U$17.11 51.5,35.5 52.5,36.5 52.5,40.25 53.87,41.62 U$18.6
PWM18
  Top 0.406: U$17.5 53.98,36.77 53.75,37 53.75,40 55.13,41.38 U$18.7
PWM19
  Top 0.406: U$19.11 74.5,39.5 73.5,38.5 73.5,34.75 72.14,33.38 U$20.6
PWM20
  Top 0.406: U$19.5 72.02,38.23 72.25,38 72.25,35 70.86,33.62 U$20.7
PWM21
  Top 0.406: U$21.11 51.5,60.5 52.5,61.5 52.5,65.25 53.87,66.61 U$22.6
PWM22
  Top 0.406: U$21.5 53.98,61.77 53.75,62 53.75,65 55.13,66.39 U$22.7
PWM23
  Top 0.406: U$23.11 74.5,64.5 73.5,63.5 73.5,59.75 72.14,58.38 U$24.6
PWM24
  Top 0.406: U$23.5 72.02,63.23 72.25,63 72.25,60 70.86,58.62 U$24.7
SCL
  Top 0.406: X1.5 6.13,11.13 6.77,11.77 U$1.10
SCL1
  Top 0.406: X2.5 35.87,13.87 35.23,13.23 U$3.10
SCL2
  Top 0.406: X3.5 6.13,36.13 6.77,36.77 U$5.10
SCL3
  Top 0.406: X4.5 35.87,38.87 35.23,38.23 U$7.10
SCL4
  Top 0.406: X5.5 6.13,61.13 6.77,61.77 U$9.10
SCL5
  Top 0.406: X6.5 35.87,63.87 35.23,63.23 U$11.10
SCL6
  Top 0.406: X7.5 48.13,11.13 48.77,11.77 U$13.10
SCL7
  Top 0.406: X8.5 77.86,13.87 77.23,13.23 U$15.10
SCL8
  Top 0.406: X9.5 48.13,36.13 48.77,36.77 U$17.10
SCL9
  Top 0.406: X10.5 77.86,38.87 77.23,38.23 U$19.10
SCL10
  Top 0.406: X11.5 48.13,61.13 48.77,61.77 U$21.10
SCL11
  Top 0.406: X12.5 77.86,63.87 77.23,63.23 U$23.10
SDA
  Top 0.406: U$1.9 6.54,13.04 5.91,12.4 X1.6
SDA1
  Top 0.406: U$3.9 35.46,11.96 36.09,12.6 X2.6
SDA2
  Top 0.406: U$5.9 6.54,38.04 5.91,37.41 X3.6
SDA3
  Top 0.406: U$7.9 35.46,36.96 36.09,37.59 X4.6
SDA4
  Top 0.406: U$9.9 6.54,63.04 5.91,62.41 X5.6
SDA5
  Top 0.406: U$11.9 35.46,61.96 36.09,62.59 X6.6
SDA6
  Top 0.406: U$13.9 48.54,13.04 47.91,12.4 X7.6
SDA7
  Top 0.406: U$15.9 77.46,11.96 78.09,12.6 X8.6
SDA8
  Top 0.406: U$17.9 48.54,38.04 47.91,37.41 X9.6
SDA9
  Top 0.406: U$19.9 77.46,36.96 78.09,37.59 X10.6
SDA10
  Top 0.406: U$21.9 48.54,63.04 47.91,62.41 X11.6
SDA11
  Top 0.406: U$23.9 77.46,61.96 78.09,62.59 X12.6
V+  (via drill 0.6)
  Top 0.406: U$2.3 11.87,21.61 11.25,21 v8.75,21
  Bottom 0.406: X1.2 8.41,7.33 IC4.1 7,10.29 7,17.75 8.75,19.5 v8.75,21 C2.1
V+1  (via drill 0.6)
  Top 0.406: U$4.3 30.14,3.38 30.75,4 v33.25,4
  Bottom 0.406: X2.2 33.59,17.68 IC6.1 35,14.71 35,7.25 33.25,5.5 v33.25,4 C4.1
V+2  (via drill 0.6)
  Top 0.406: U$6.3 11.87,46.62 11.25,46 v8.75,46
  Bottom 0.406: X3.2 8.41,32.33 IC9.1 7,35.29 7,42.75 8.75,44.5 v8.75,46 C6.1
V+3  (via drill 0.6)
  Top 0.406: U$8.3 30.14,28.39 30.75,29 v33.25,29
  Bottom 0.406: X4.2 33.59,42.67 IC12.1 35,39.71 35,32.25 33.25,30.5 v33.25,29 C8.1
V+4  (via drill 0.6)
  Top 0.406: U$10.3 11.87,71.61 11.25,71 v8.75,71
  Bottom 0.406: X5.2 8.41,57.33 IC15.1 7,60.29 7,67.75 8.75,69.5 v8.75,71 C10.1
V+5  (via drill 0.6)
  Top 0.406: U$12.3 30.14,53.38 30.75,54 v33.25,54
  Bottom 0.406: X6.2 33.59,67.67 IC18.1 35,64.71 35,57.25 33.25,55.5 v33.25,54 C12.1
V+6  (via drill 0.6)
  Top 0.406: U$14.3 53.87,21.61 53.25,21 v50.75,21
  Bottom 0.406: X7.2 50.41,7.33 IC21.1 49,10.29 49,17.75 50.75,19.5 v50.75,21 C14.1
V+7  (via drill 0.6)
  Top 0.406: U$16.3 72.14,3.38 72.75,4 v75.25,4
  Bottom 0.406: X8.2 75.58,17.68 IC24.1 77,14.71 77,7.25 75.25,5.5 v75.25,4 C16.1
V+8  (via drill 0.6)
  Top 0.406: U$18.3 53.87,46.62 53.25,46 v50.75,46
  Bottom 0.406: X9.2 50.41,32.33 IC27.1 49,35.29 49,42.75 50.75,44.5 v50.75,46 C18.1
V+9  (via drill 0.6)
  Top 0.406: U$20.3 72.14,28.39 72.75,29 v75.25,29
  Bottom 0.406: X10.2 75.58,42.67 IC30.1 77,39.71 77,32.25 75.25,30.5 v75.25,29 C20.1
V+10  (via drill 0.6)
  Top 0.406: U$22.3 53.87,71.61 53.25,71 v50.75,71
  Bottom 0.406: X11.2 50.41,57.33 IC33.1 49,60.29 49,67.75 50.75,69.5 v50.75,71 C22.1
V+11  (via drill 0.6)
  Top 0.406: U$24.3 72.14,53.38 72.75,54 v75.25,54
  Bottom 0.406: X12.2 75.58,67.67 IC36.1 77,64.71 77,57.25 75.25,55.5 v75.25,54 C24.1
VPP  (via drill 0.6)
  Top 0.406: v8.5,16.25 6.5,16.25 6,15.75 5,15.75 4.2,14.95 X1.8
  Bottom 0.406: v8.5,16.25 11.5,16.25 14.25,19 15.25,19 16.04,19.79 VPP.1
VPP1  (via drill 0.6)
  Top 0.406: v33.5,8.75 35.5,8.75 36,9.25 37,9.25 37.8,10.05 X2.8
  Bottom 0.406: v33.5,8.75 30.5,8.75 27.75,6 26.75,6 25.96,5.21 VPP1.1
VPP2  (via drill 0.6)
  Top 0.406: v8.5,41.25 6.5,41.25 6,40.75 5,40.75 4.2,39.95 X3.8
  Bottom 0.406: v8.5,41.25 11.5,41.25 14.25,44 15.25,44 16.04,44.79 VPP2.1
VPP3  (via drill 0.6)
  Top 0.406: v33.5,33.75 35.5,33.75 36,34.25 37,34.25 37.8,35.05 X4.8
  Bottom 0.406: v33.5,33.75 30.5,33.75 27.75,31 26.75,31 25.96,30.21 VPP3.1
VPP4  (via drill 0.6)
  Top 0.406: v8.5,66.25 6.5,66.25 6,65.75 5,65.75 4.2,64.94 X5.8
  Bottom 0.406: v8.5,66.25 11.5,66.25 14.25,69 15.25,69 16.04,69.79 VPP4.1
VPP5  (via drill 0.6)
  Top 0.406: v33.5,58.75 35.5,58.75 36,59.25 37,59.25 37.8,60.05 X6.8
  Bottom 0.406: v33.5,58.75 30.5,58.75 27.75,56 26.75,56 25.96,55.21 VPP5.1
VPP6  (via drill 0.6)
  Top 0.406: v50.5,16.25 48.5,16.25 48,15.75 47,15.75 46.2,14.95 X7.8
  Bottom 0.406: v50.5,16.25 53.5,16.25 56.25,19 57.25,19 58.04,19.79 VPP6.1
VPP7  (via drill 0.6)
  Top 0.406: v75.5,8.75 77.5,8.75 78,9.25 79,9.25 79.81,10.05 X8.8
  Bottom 0.406: v75.5,8.75 72.5,8.75 69.75,6 68.75,6 67.96,5.21 VPP7.1
VPP8  (via drill 0.6)
  Top 0.406: v50.5,41.25 48.5,41.25 48,40.75 47,40.75 46.2,39.95 X9.8
  Bottom 0.406: v50.5,41.25 53.5,41.25 56.25,44 57.25,44 58.04,44.79 VPP8.1
VPP9  (via drill 0.6)
  Top 0.406: v75.5,33.75 77.5,33.75 78,34.25 79,34.25 79.81,35.05 X10.8
  Bottom 0.406: v75.5,33.75 72.5,33.75 69.75,31 68.75,31 67.96,30.21 VPP9.1
VPP10  (via drill 0.6)
  Top 0.406: v50.5,66.25 48.5,66.25 48,65.75 47,65.75 46.2,64.94 X11.8
  Bottom 0.406: v50.5,66.25 53.5,66.25 56.25,69 57.25,69 58.04,69.79 VPP10.1
VPP11  (via drill 0.6)
  Top 0.406: v75.5,58.75 77.5,58.75 78,59.25 79,59.25 79.81,60.05 X12.8
  Bottom 0.406: v75.5,58.75 72.5,58.75 69.75,56 68.75,56 67.96,55.21 VPP11.1

## Text on the board
Top: 1.1 | 1.1 | 1.1 | 1.1 | 1.1 | 1.1 | 1.1 | 1.1 | 1.1 | 1.1 | 1.1 | 1.1